# Altium PCB main.PcbDoc
Units mm, origin at the board's own origin, x right, y up, seen from the top; angles counter-clockwise.
Board outline 152.4 x 101.6 mm, 2 copper layers (Top Layer, Bottom Layer); 9 components, 6 nets, 36 pads, 11 vias.
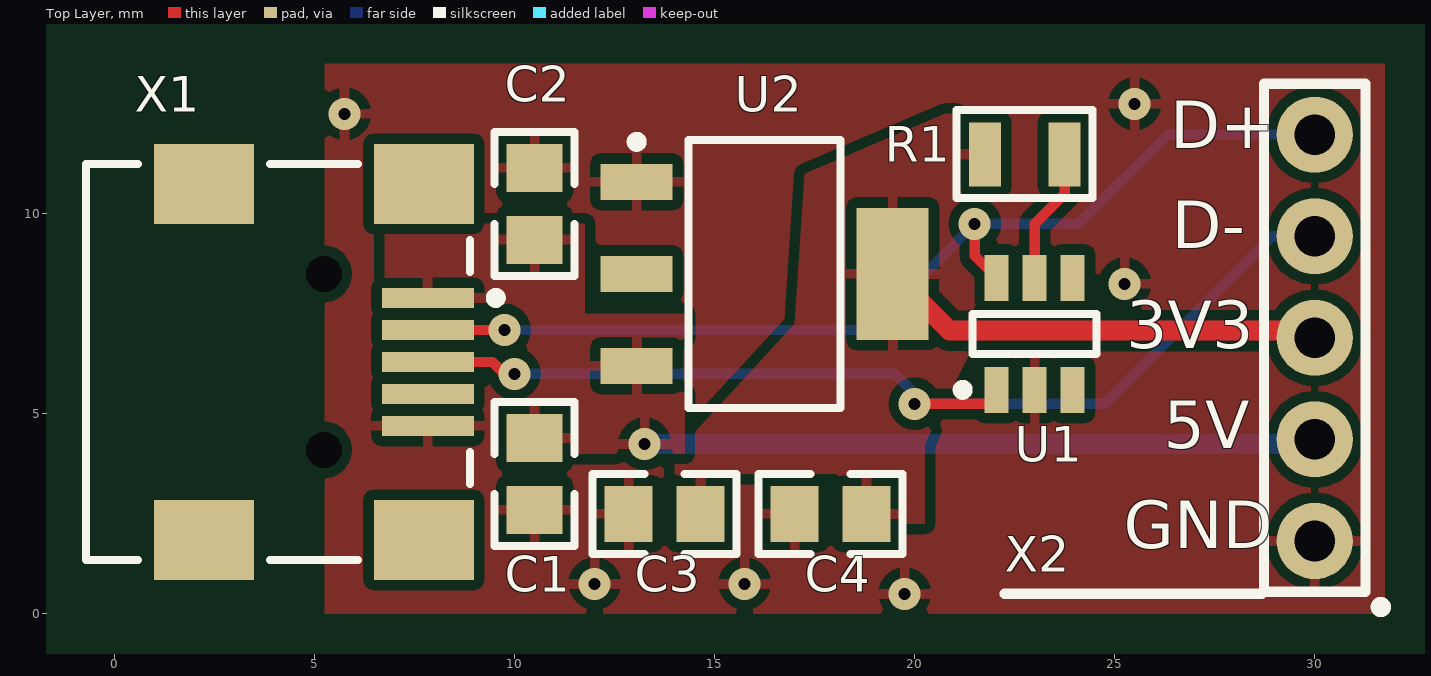
[diagram p0: Top Layer view]
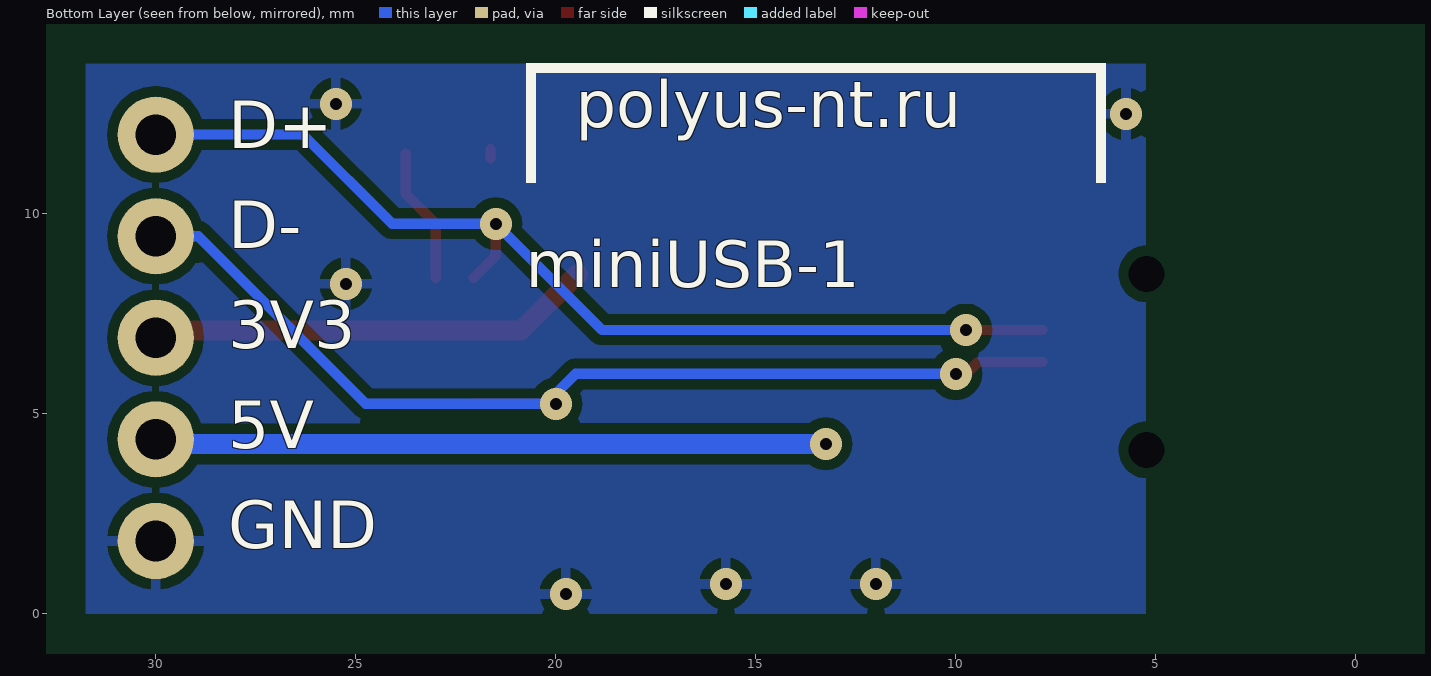
[diagram p1: Bottom Layer view, seen from below]
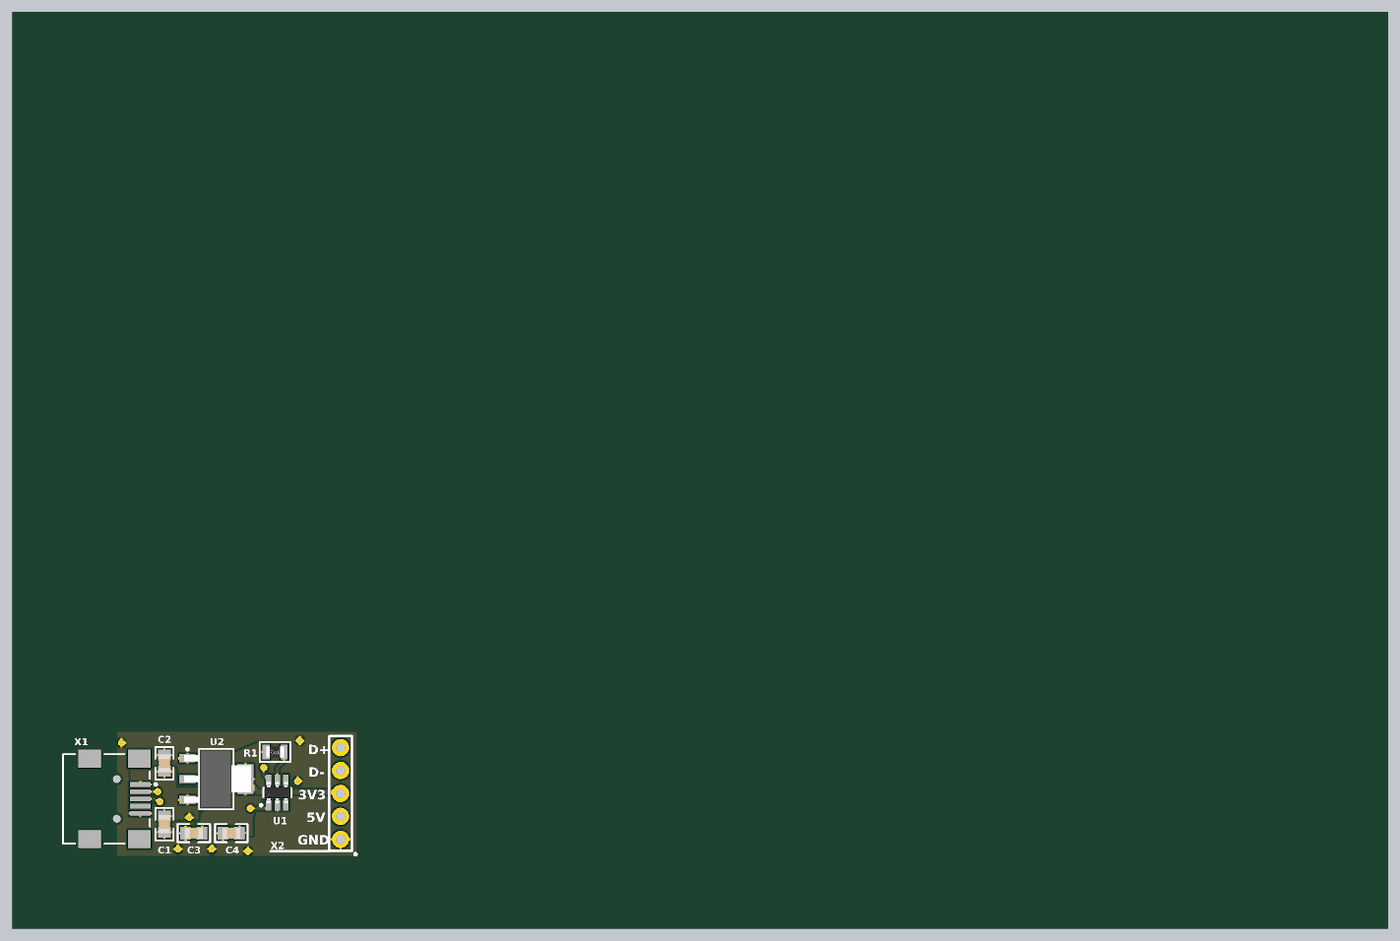
[diagram p2: 3D render of the assembled board from above, using the file's embedded part models]

## Layer stack, top to bottom
Top Solder: solder mask 0.0102, Solder Resist, Dk 3.5
Top Layer: signal copper 0.0356
Dielectric 1: dielectric 0.32, FR-4, Dk 4.8
Bottom Layer: signal copper 0.0356
Bottom Solder: solder mask 0.0102, Solder Resist, Dk 3.5

## Board outline
-6.373,-8.103 146.027,-8.103 146.027,93.497 -6.373,93.497

## Design rules (kind name [scope] priority, off if disabled: settings)
Clearance [All] p1: gap=0.254 ignorepadtopadclearanceinfootprint=FALSE except(0: Arc-Hole Track-Hole SMDPad-Hole THPad-Hole Via-Hole Fill-Hole Poly-Hole Region-Hole Text-Hole)
PolygonConnect [All] p1: connectstyle=Relief reliefconductorwidth=0.254 reliefentries=4 polygonreliefangle="90 Angle" airgapwidth=0.254
RoutingVias [All] p1: holewidth=0.711 width=1.27 viastyle="Through Hole" minholewidth=0.711 minwidth=1.27 maxholewidth=0.711 maxwidth=1.27
SolderMaskExpansion [All] p1: expansion=0.102
Width [All] p1: maxlimit=0.254 minlimit=0.254 preferedwidth=0.254
30 further rules are at their usual default settings.

## Classes and differential pairs
component class main: C2 C3 C4 R1 U1 X1 X2

## Components (designator, comment, footprint, x,y, rotation, side; value= is the part's Value field where it differs from the comment)
C1 "C-керамика" CAPC2012-0805 10.5,3.5 r270 top
C2 "C-керамика" CAPC2012-0805 10.5,10.25 r90 top
C3 "C-керамика" CAPC2012-0805 13.75,2.5 r180 top
C4 "C-керамика" CAPC2012-0805 17.9,2.5 r180 top
R1 "R" CR2012-0805 22.75,11.5 r180 top
U1 "NUP2201MR6T1G" SOT-23-6 23,7 r90 top
U2 "LDO-3V3" SOT-223 16.25,8.5 r0 top
X1 "miniUSB" USB/SM0.8-6H5 -0.023,6.297 r180 top
X2 "*" PBS_5-1 42.7,-10.88 r90 top

## Footprints (in the part's own frame and the unit in brackets; to place one, negate y for a bottom-side part, rotate by r counter-clockwise, add the part's x,y. Pads: shape width x height; smd on the part's side, far side on the other; paste and mask are expansions set on the pad)
CAPC2012-0805 [mm] "Chip Capacitor, 2-Leads, Body 2.0x1.3mm, IPC Medium Density"
  rect 1.2x1.4 smd: 1(-0.9,0) 2(0.9,0)
  silkscreen extent -1.8,-1 1.8,1, body extent -1,-0.62 1,0.62, height 0.6
CR2012-0805 [mm]
  rect 0.8x1.6 smd: 1(-0.99,0.015) 2(0.99,0.015)
  silkscreen extent -1.7,-1.1 1.7,1.1, body extent -0.99,-0.6 0.99,0.63, height 0.49
PBS_5-1 [mil]
  round 75 hole 40: 1(500,500) 2(600,500) 3(700,500) 4(800,500) 5(900,500)
  silkscreen extent 430,430 950,550
SOT-23-6 [mm] "SOT23, 6-Leads, Body 2,90x2,80mm, Pitch 0,95mm, IPC Medium Density"
  rect 1.15x0.6 smd: 1(-1.4,0.95) 2(-1.4,0) 3(-1.4,-0.95) 4(1.4,-0.95) 5(1.4,0) 6(1.4,0.95)
  silkscreen extent -1.52,-1.55 0.5,1.92, body extent -1.17,-1.46 1.17,1.46, height 1
SOT-223 [mm] "SOT223, 4-Leads, Body 6,7x7,3mm (max), Pitch 2,30mm, IPC Medium Density"
  rect 1.8x0.9 smd: 1(-3.2,2.3) 2(-3.2,0) 3(-3.2,-2.3)
  rect 1.8x3.3 smd: 4(3.2,0)
  silkscreen extent -3.32,-3.35 1.9,3.42, body extent -3.57,-3.25 3.82,3.25, height 1.6
USB/SM0.8-6H5 [mm] "Connector; USB2.0, Type B, SM; 5 Position; Right Angle"
  rect 2.3x0.5 smd: 1(-7.85,-1.6) 2(-7.85,-0.8) 3(-7.85,0) 4(-7.85,0.8) 5(-7.85,1.6)
  rect 2.5x2 smd: 6(-7.75,4.45) 7(-2.25,4.45) 8(-7.75,-4.45) 9(-2.25,-4.45)
  round 0.6 hole 0.9 unplated: MH1(-5.25,2.2) MH2(-5.25,-2.2)
  silkscreen extent -9.68,-4.95 0.7,4.95, body extent -8.9,-4.95 0.7,4.95, height 3.9

## Part data
C1 C3: "Керамический конденсатор", Capacity=10мкФ
C2 C4: "Керамический конденсатор", Capacity=100нФ
R1: "Резистор", Resistance=10к
U2: library part LD1117AS33TR, "Voltage regulator, 3v3"
X2: library part PBS-5-1

## Via types
v1: diameter 0.8, hole 0.3, Top Layer to Bottom Layer, 11 vias

## Nets (pads, with @x,y where several pads share a name; then routed paths per layer and width w, separated by ;. In a path a pad name is that pad's centre, name@x,y a point inside that pad or via, vN(x,y) a via of type N, cw(c..) or ccw(c..) an arc to the next point about the centre after c; other vN are vias at no path point)
3V3: C3.1 C4.1 R1.2 U2.4 X2.3 | length 11.4
  Top Layer w0.254: R1.2@21.635,11.385 R1.2@21.635,11.615
  Top Layer w0.5: U2.4 20.87,7.08 X2.3@30,7.08
GND: C1.2 C2.2 C3.2 C4.2 U1.2 U2.1 X1.5 X2.1
  other v1: 19.75,0.5 12,0.75 15.75,0.75 25.25,8.25 5.75,12.5 25.5,12.75
NetR1_1: R1.1 U1.5 | length 3.4
  Top Layer w0.254: U1.5 23,9.75 23.75,10.5 R1.1@23.75,11.5
NetU1_1: U1.1 X1.3 X2.4 | length 26.7
  Top Layer w0.254: X1.3 9.439,6.297 9.75,5.987 9.763,6 v1(10,6) ; v1(20,5.25) U1.1@22.05,5.25
  Bottom Layer w0.254: v1(10,6) 19.5,6 v1@20.25,5.25 ; v1(20,5.25) v1@20.25,5.25 ; X2.4 28.94,9.44 24.75,5.25 v1@20.25,5.25
NetU1_6: U1.6 X1.2 X2.5 | length 25.8
  Top Layer w0.254: X1.2 v1(9.75,7.097) ; v1(21.5,9.75) 21.5,8.95 U1.6
  Bottom Layer w0.254: v1(9.75,7.097) 18.847,7.097 v1(21.5,9.75) 24.09,9.75 26.32,11.98 X2.5
VCC: C1.1 C2.1 U2.3 X1.1 X2.2 | length 16.8
  Bottom Layer w0.5: v1@13.25,4.247 X2.2@30,4.247
  other v1: 13.25,4.25
pads on no net: U1.3 U1.4 U2.2 X1.4 X1.6 X1.7 X1.8 X1.9 X1.MH1 X1.MH2

## Polygon pours and split planes (outlines as drawn)
GND on Top Layer "GND_L01_P010" (solid, remove dead copper, pour order 10): 5.25,13.75 5.25,0 31.75,0 31.75,13.75
3V3 on Top Layer "3V3_L01_P006" (solid, pour order 6): 14,4 17,7.25 17.25,11 20.75,12.5 22,12.5 22,7.75 20.25,4.25 20.25,2.25 18,2.25 18,3.5 15.5,3.5 15.5,1.5 14,1.5
VCC on Top Layer "VCC_L01_P004" (solid, pour order 4): 9.5,7.77 6.75,7.77 6.75,9.75 11.75,9.75 11.75,7.5 14.25,7.5 14.25,4 9.5,4
GND on Bottom Layer "GND_L02_P015" (solid, pour order 15): 5.25,13.75 31.75,13.75 31.75,0 5.25,0

## Silkscreen, mask and mechanical layers (free items; w line width, h text height)
Top Overlay:
  lines w0.254: 22.25,0.5 28.68,0.5 28.73,0.55
  text "D+" at 26.388,11.247 h2.03
  text "D-" at 26.43,8.747 h2.03
  text "3V3" at 25.293,6.247 h2.03
  text "5V" at 26.224,3.747 h2.03
  text "GND" at 25.227,1.247 h2.03
Bottom Overlay:
  region: 20.747,13.773 6.247,13.773 6.247,13.523 20.747,13.523
  region: 6.497,13.773 6.247,13.773 6.247,10.773 6.497,10.773
  region: 20.747,13.773 20.497,13.773 20.497,10.773 20.747,10.773
  text "polyus-nt.ru" at 19.497,11.773 h2
  text "D+" at 28.189,11.247 h2.03
  text "D-" at 28.189,8.747 h2.03
  text "miniUSB-1" at 20.747,7.773 h2
  text "3V3" at 28.189,6.247 h2.03
  text "5V" at 28.189,3.747 h2.03
  text "GND" at 28.189,1.247 h2.03
Mechanical 1:
  lines w0.254: 0,-0.003 0,13.75 31.75,13.75 31.75,-0.003 0,-0.003

## Text inside footprints (layer, text, board x,y; h text height)
X1: Mechanical 1 "PCB Edge" at -0.455,10.334 h0.25 r270